# Altium PCB VNA_BASE_AF2.PcbDoc
Units mm, origin at the board's own origin, x right, y up, seen from the top; angles counter-clockwise.
Board outline 49.78 x 42.68 mm, 4 copper layers (Top Layer, Internal Plane 1, Signal Layer 1, Bottom Layer), stack 0.778 mm thick; 89 components, 116 nets, 460 pads, 227 vias.
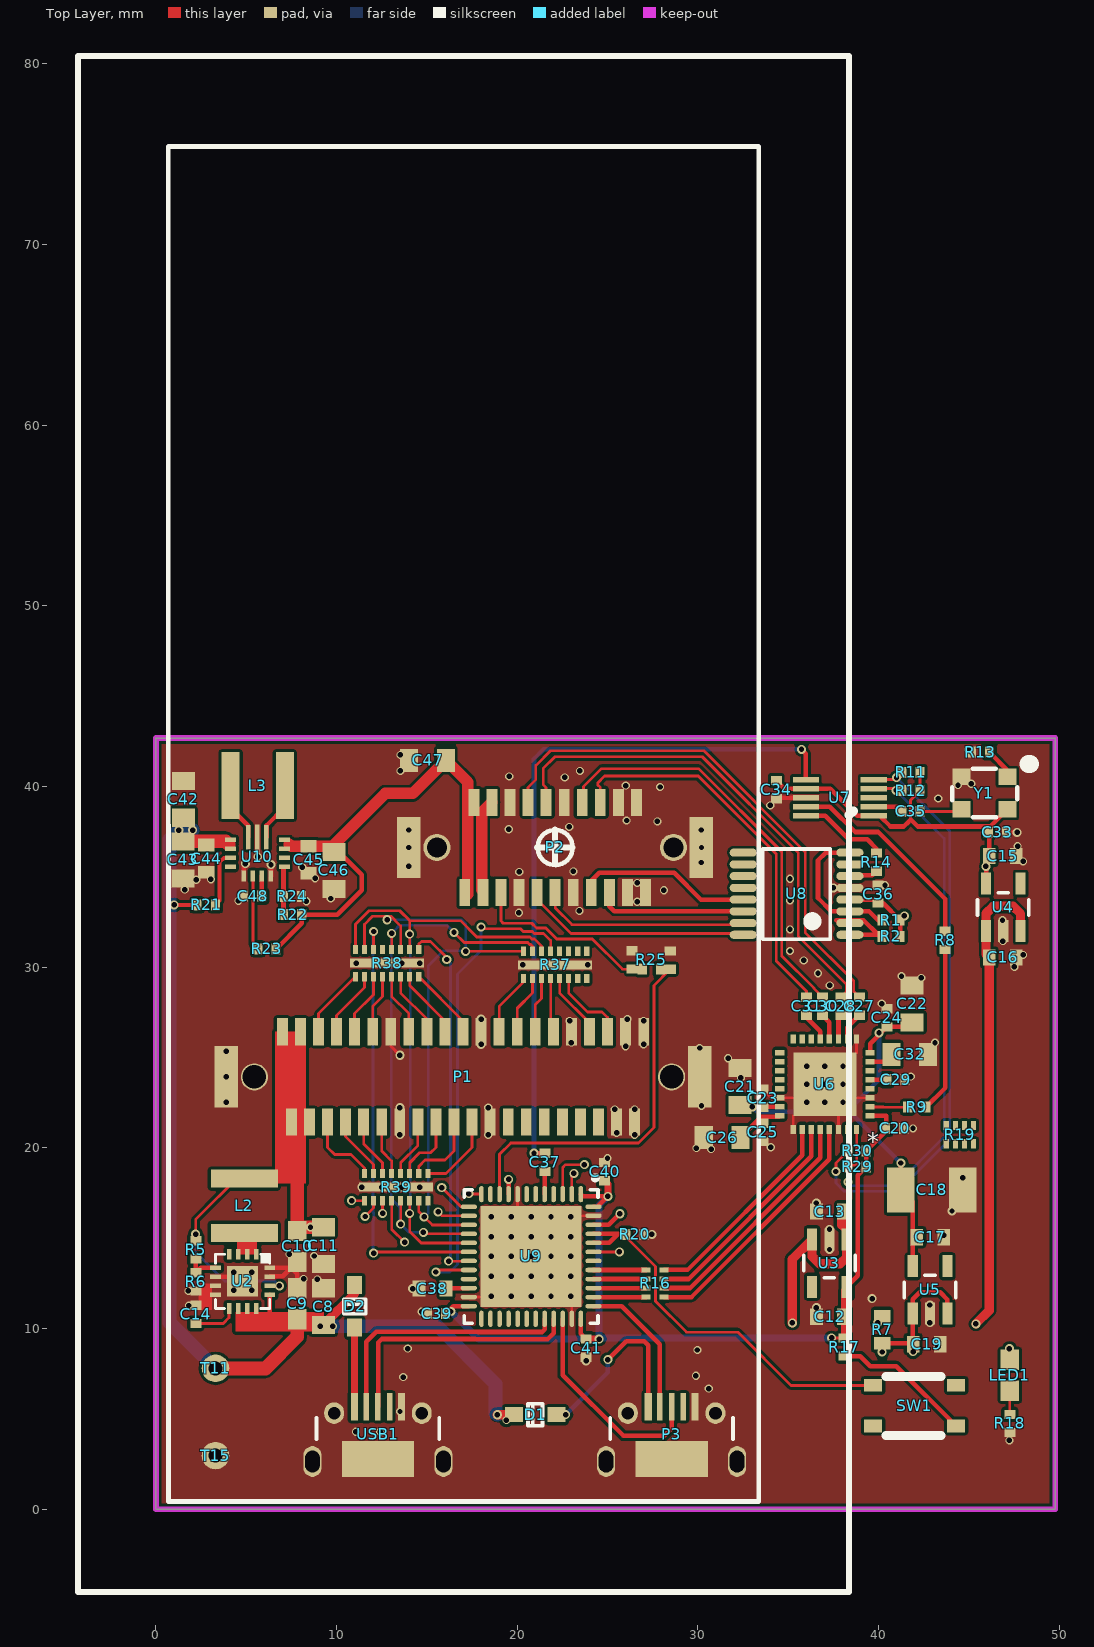
[diagram p0: Top Layer view]
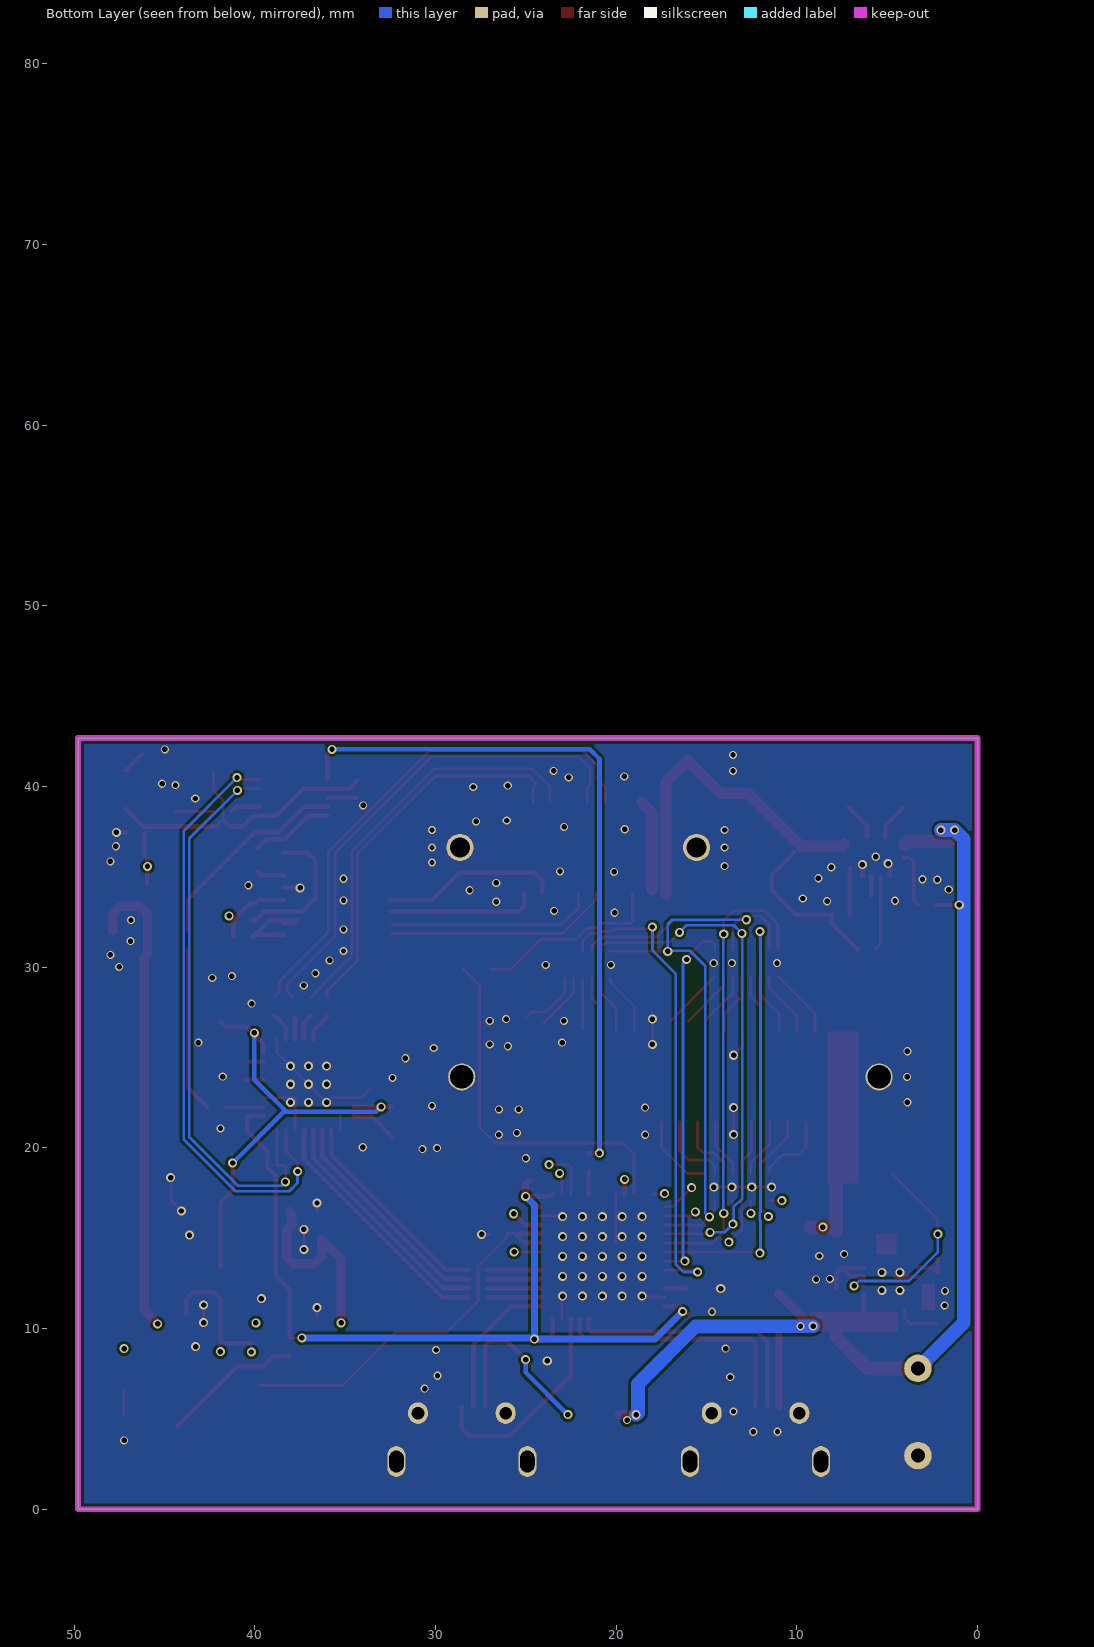
[diagram p1: Bottom Layer view, seen from below]
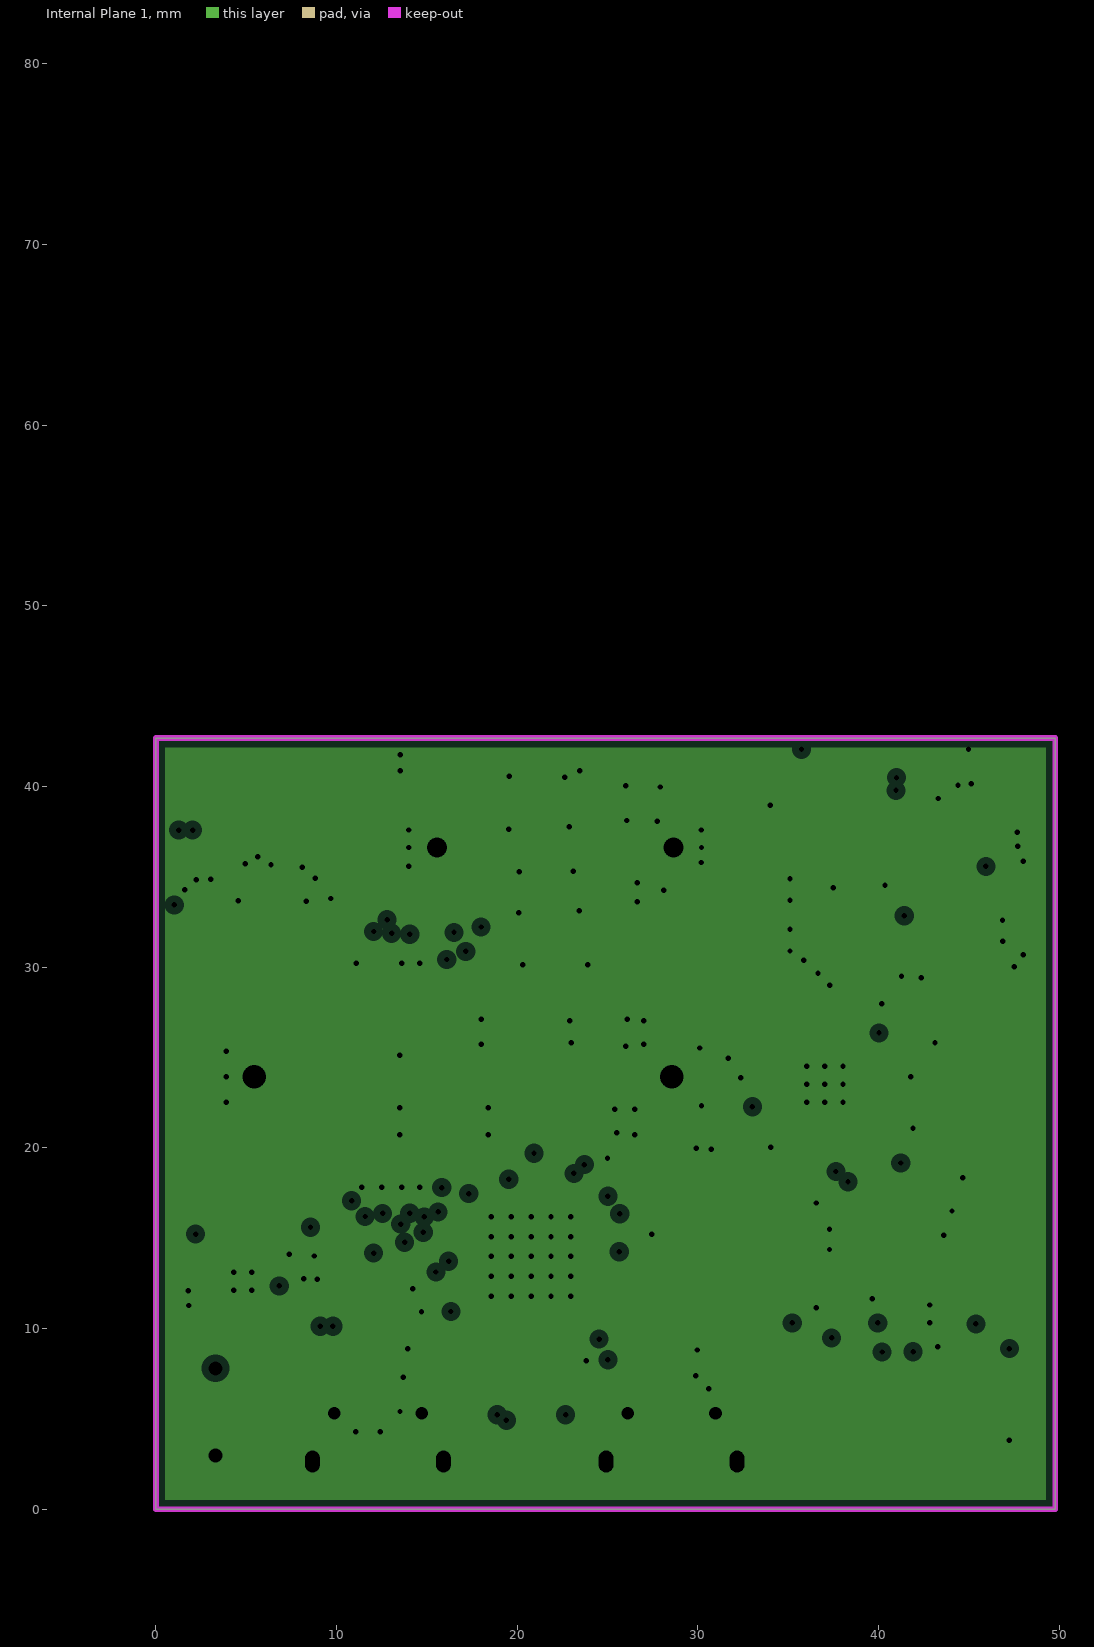
[diagram p2: Internal Plane 1, clearances drawn from the general rule]
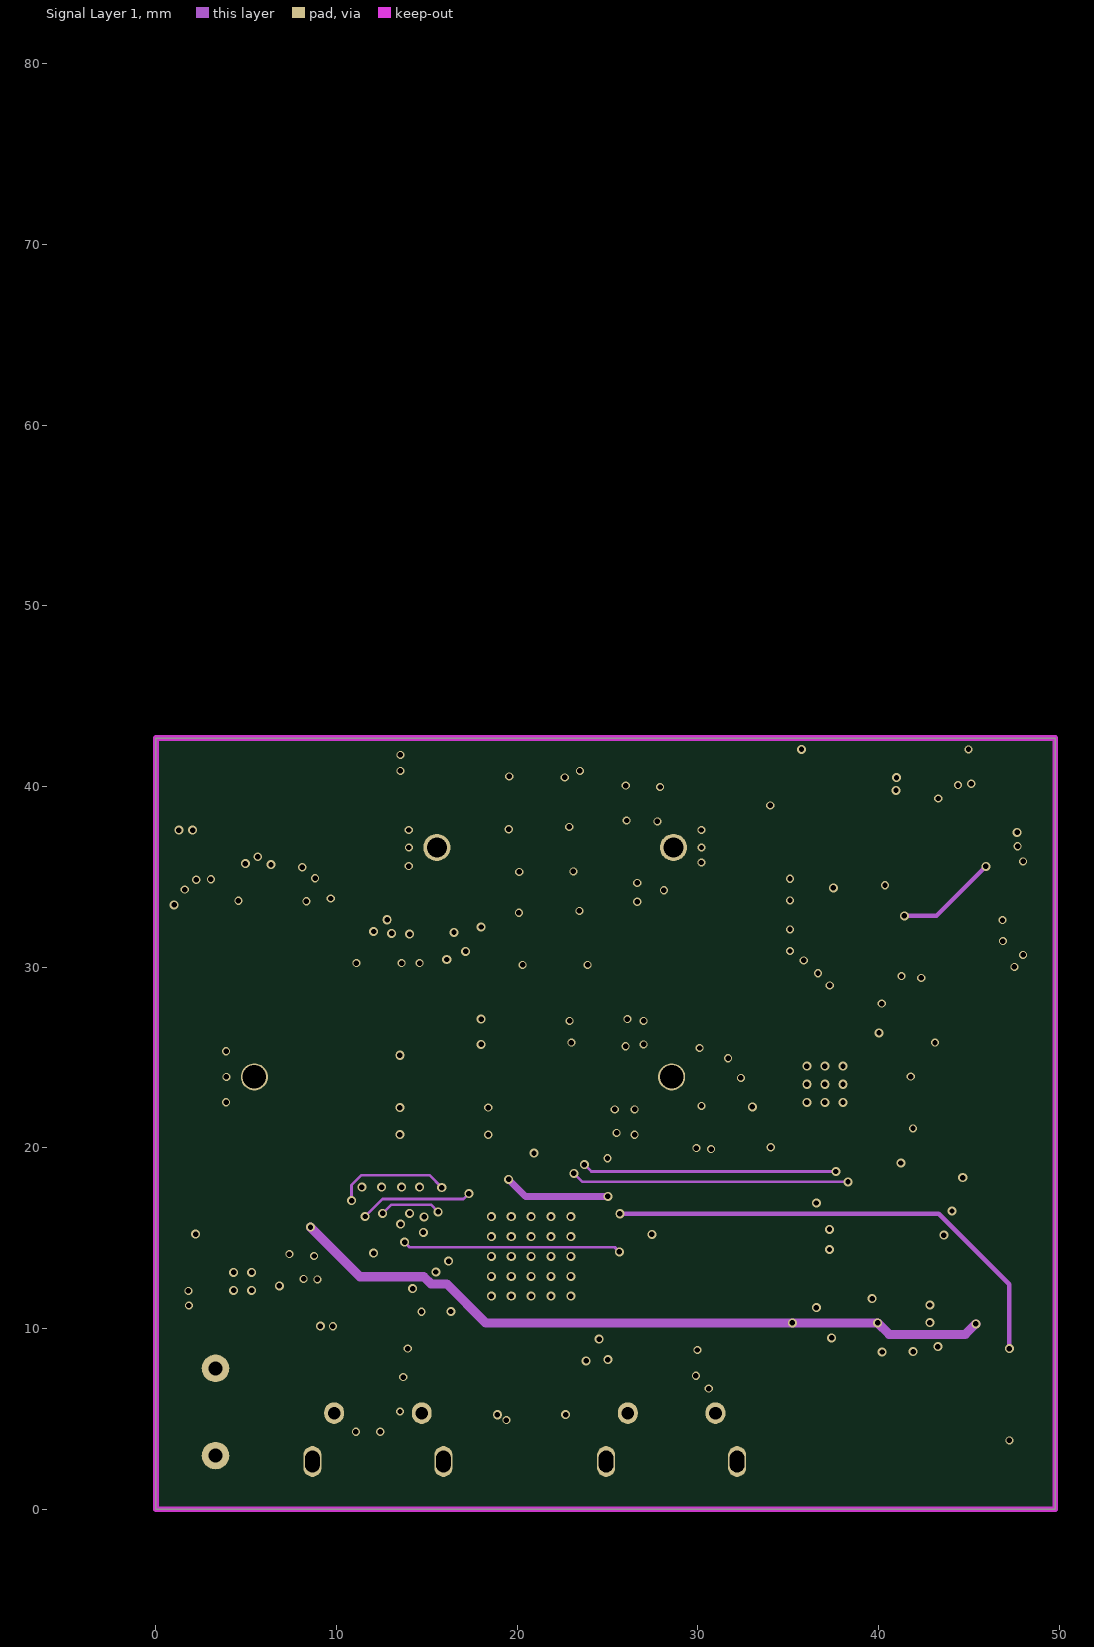
[diagram p3: Signal Layer 1]

## Layer stack, top to bottom
Top Solder: solder mask 0.0102, Solder Resist, Dk 3.8
Top Layer: signal copper 0.0356
Dielectric 1: core 0.254, Dk 4.2
Internal Plane 1: plane copper 0.036, net GND
Dielectric 3: core 0.254, Dk 4.2
Signal Layer 1: signal copper 0.036
Dielectric 4: prepreg 0.127, Dk 4.2
Bottom Layer: signal copper 0.0356
Bottom Solder: solder mask 0.0102, Solder Resist, Dk 3.8

## Board outline
0,0 0,42.682 49.784,42.682 49.784,0

## Design rules (kind name [scope] priority, off if disabled: settings)
Clearance 50R [InNetClass('50R') vs InPolygon] p1: gap=0.381 ignorepadtopadclearanceinfootprint=FALSE
Clearance [All] p2: gap=0.152 ignorepadtopadclearanceinfootprint=FALSE except(0: Arc-Hole Track-Hole SMDPad-Hole THPad-Hole Via-Hole Fill-Hole Poly-Hole Region-Hole Text-Hole)
DiffPairsRouting [All] p1: maxlimit=0.254 minlimit=0.152 mostfreqgap=0.152 toplayer_minwidth=0.152 toplayer_maxwidth=0.381 toplayer_prefwidth=0.381 midlayer1_minwidth=0.152 midlayer1_maxwidth=0.381 midlayer1_prefwidth=0.381 bottomlayer_minwidth=0.152 bottomlayer_maxwidth=0.381 bottomlayer_prefwidth=0.381 maxuncoupledlength=12.7
MinimumSolderMaskSliver [All] p1 off: minsoldermaskwidth=0.254
PlaneClearance [All] p1: clearance=0.381
PlaneConnect [All] p1: planeconnectstyle=Direct reliefexpansion=0.508 reliefentries=4 reliefconductorwidth=0.254 reliefairgap=0.254
PolygonConnect [All] p1: connectstyle=Direct reliefconductorwidth=0.254 reliefentries=4 polygonreliefangle="90 Angle" airgapwidth=0.254
RoomDefinition connectorA [InComponentClass('connectorA')] p1 off: confinementstyle=ConfineIn formatcopy=TRUE lockcomponents=FALSE outline 33.427,24.437 61.672,24.437 61.672,30.177 33.427,30.177
RoomDefinition AudioADCA [InComponentClass('AudioADCA')] p2 off: confinementstyle=ConfineIn formatcopy=TRUE lockcomponents=FALSE outline 33.427,4.015 132.437,4.015 132.437,13.032 33.427,13.032
RoomDefinition clock [InComponentClass('clock')] p3 off: confinementstyle=ConfineIn formatcopy=TRUE lockcomponents=FALSE outline 33.402,11.356 97.918,11.356 97.918,20.221 33.402,20.221
RoomDefinition MCU [InComponentClass('MCU')] p4 off: confinementstyle=ConfineIn formatcopy=TRUE lockcomponents=FALSE outline 22.328,39.982 254.738,39.982 254.738,48.872 22.328,48.872
RoomDefinition power [InComponentClass('power')] p5 off: confinementstyle=ConfineIn formatcopy=TRUE lockcomponents=FALSE outline 22.455,31.727 74.652,31.727 74.652,38.712 22.455,38.712
RoutingVias [All] p1: holewidth=0.305 width=0.508 viastyle="Through Hole" minholewidth=0.3 minwidth=0.5 maxholewidth=0.711 maxwidth=1.27
SilkToBoardRegionClearance [All] p1 off:
SilkToSilkClearance [All] p1 off: silktosilkclearance=0.254
SilkToSolderMaskClearance [IsPad] p1 off: minsilkscreentomaskgap=0.254 clearancetoexposedcopper=TRUE
SolderMaskExpansion [All] p1: expansion=0.102
Width [All] p1: maxlimit=1.524 minlimit=0.152 preferedwidth=0.152
23 further rules are at their usual default settings.

## Classes and differential pairs
component class MCU: C37 C38 C39 C40 C41 D1 D2 LED1 P3 R16 R17 R18 R19 R20 SW1 U9 USB1
component class connectorA: P1 P2 R25 R37 R38 R39
component class clock: C33 C34 C35 C36 R1 R2 R8 R11 R12 R13 R14 U7 U8 Y1
component class power: C8 C9 C10 C11 C12 C13 C14 C15 C16 C17 C18 C19 C42 C43 C44 C45 C46 C47 C48 L2 L3 R5 R6 R7 R21 R22 R23 R24 T11 T15 U2 U3 U4 U5 U10
component class AudioADCA: C20 C21 C22 C23 C24 C25 C26 C27 C28 C29 C30 C31 C32 R9 R29 R30 U6
differential pair REFLECT1: +REFLECT1_P -REFLECT1_N
differential pair REF1: +REF1_P -REF1_N

## Components (designator, comment, footprint, x,y, rotation, side; value= is the part's Value field where it differs from the comment)
C8 "Cap" 0805 9.269,11.218 r90 top value="22uF 25V"
C9 "Cap" 0603 7.821,11.37 r90 top value="4.7uF 25V"
C10 "Cap" 0603 7.821,14.545 r90 top value="4.7uF 25V"
C11 "Cap" 0805 9.269,14.596 r90 top value="22uF 25V"
C12 "4.7uF" 0603L 37.315,10.663 r0 top
C13 "4.7uF" 0603L 37.315,16.479 r0 top
C14 "3.3nF" 0402 2.211,10.786 r90 top
C15 "4.7uF" 0603L 46.878,36.157 r180 top
C16 "4.7uF" 0603L 46.878,30.544 r180 top
C17 "4.7uF" 0603L 42.872,15.058 r180 top
C18 "220uF,Tan" 1210 42.948,17.674 r180 top
C19 "4.7uF" 0603L 42.669,9.14 r180 top
C20 "0.1uF" 0402 40.894,21.082 r180 top
C21 "4.7uF" 0805 32.336,23.399 r270 top
C22 "4.7uF" 0805 41.861,27.971 r270 top
C23 "0.1uF" 0402 33.606,22.764 r270 top
C24 "0.1uF" 0402 40.464,27.209 r270 top
C25 "0.1uF" 0402 33.606,20.859 r90 top
C26 "4.7uF" 0805 31.344,20.574 r0 top
C27 "10uF" 0402 38.94,27.844 r90 top
C28 "10uF" 0402 37.924,27.844 r90 top
C29 "4.7uF" 0402 40.972,23.78 r180 top
C30 "10uF" 0402 36.908,27.844 r270 top
C31 "10uF" 0402 36.019,27.844 r270 top
C32 "22uF" 0805 41.734,25.177 r180 top
C33 "0.1uF" 0402 46.584,37.465 r180 top
C34 "0.1uF" 0402 34.342,39.84 r270 top
C35 "0.1uF" 0402 41.795,38.629 r180 top
C36 "0.1uF" 0402 39.977,34.06 r270 top
C37 "Cap" 0402 21.535,19.201 r90 top value=0.1uF
C38 "Cap" 0603L 15.312,12.216 r0 top value=4.7uF
C39 "Cap" 0402 15.533,10.833 r0 top value=0.1uF
C40 "Cap" 0402 24.837,18.693 r270 top value=0.1uF
C41 "Cap" 0402 23.821,8.914 r90 top value=0.1uF
C42 "10uF" 0805 1.524,39.294 r270 top
C43 "10uF" 0805 1.499,35.941 r90 top
C44 "0.1uF" 0603L 2.794,36.017 r90 top
C45 "0.1uF" 0603L 8.455,35.959 r90 top
C46 "10uF" 0805 9.852,35.359 r90 top
C47 "10uF" 0805 15.039,41.456 r0 top
C48 "0.1uF" 0402 5.359,33.934 r180 top
D1 "" LC-SOD-323 21.002,5.232 r0 top
D2 "" LC-SOD-323 11.002,11.232 r270 top
L2 "2.2uH" L4015 4.9,15.3 r90 top
L3 "1.5uH" L4015 4.137,40.06 r0 top
LED1 "LED0" 0603 47.268,7.421 r270 top
P1 "DF9-41S" VNA_CHANNEL 0.702,0.432 r0 top
P2 "DF9-21" DF9-21P 22.102,36.632 r180 bottom
P3 "SWD_MicroUSB" MICRO-YZX 28.55,-0.178 r0 top
R1 "10k" 0402 40.686,32.615 r0 top
R2 "10k" 0402 40.686,31.715 r0 top
R5 "51k 1%" 0402 2.211,14.367 r270 top
R6 "10k 1%" 0402 2.211,12.589 r270 top
R7 "FB" 0603L 40.202,9.932 r90 top value=0Ohm
R8 "22R" 0402 43.688,31.496 r270 top
R9 "22R" 0402 42.115,22.256 r0 top
R11 "4.7k" 0402 41.795,40.788 r180 top
R12 "4.7k" 0402 41.795,39.772 r180 top
R13 "NC" 0402 45.644,41.91 r180 top
R14 "22R" 0402 39.878,35.814 r90 top
R16 "50R*4" 0402X4 27.635,12.497 r180 top
R17 "1k" 0402 38.099,8.975 r90 top value=0Ohm
R18 "10k" 0402 47.268,4.754 r270 top value=0Ohm
R19 "50R*4" 0402X4 44.502,20.732 r90 top
R20 "Res2" 0402 26.518,15.215 r0 top value=10k
R21 "10k" 0402 2.794,33.452 r180 top
R22 "17k" 0402 7.566,32.911 r0 top
R23 "10k" 0402 6.147,31.013 r0 top
R24 "10k" 0402 7.566,33.927 r180 top
R25 "PiFilter" PiFIiter 27.432,29.896 r180 top
R29 "Res2" 0402 38.813,18.954 r0 top value=10k
R30 "Res2" 0402 38.813,19.843 r0 top value=10k
R37 "NUF8xxx" NUF8xxx 22.102,30.132 r0 top
R38 "NUF8xxx" NUF8xxx 12.802,30.232 r0 top
R39 "NUF8xxx" NUF8xxx 13.302,17.832 r0 top
SW1 "SW-PB" SW3x4 42.002,5.732 r0 top
T11 "TestPad" TestPad 3.302,7.798 r0 top
T15 "TestPad" TestPad 3.302,2.972 r90 top
U2 "TPS62130" TPS62130 4.802,12.615 r270 top
U3 "LP5907" SOT23-5 37.29,13.634 r180 top
U4 "LP5907" SOT23-5 46.904,33.312 r0 top
U5 "LP5907" SOT23-5 42.847,12.137 r0 top
U6 "ADAU1761" ADAU1761 37.035,23.526 r180 top
U7 "SI5351" si5351 37.858,39.391 r180 top
U8 "SN65LVDS105" "TSSOP16_44MM_065P - duplicate" 35.465,34.073 r180 top
U9 "STM32F401CCU6" STM-UFQFPN48_N 20.773,13.994 r270 top
U10 "tps63070" TPS63070 5.623,36.305 r90 top
USB1 "USB Micro Type B" MICRO-YZX 12.294,-0.178 r0 top
Y1 "OSC_40M" TXC_7Q 45.859,39.645 r180 top

## Footprints (in the part's own frame and the unit in brackets; to place one, negate y for a bottom-side part, rotate by r counter-clockwise, add the part's x,y. Pads: shape width x height; smd on the part's side, far side on the other; paste and mask are expansions set on the pad)
0402 [mil] "0402-RES"
  rect 20x24 smd: 1(-19.68,0) 2(20,0)
0402X4 [mm]
  rect 0.5x0.28 smd: 1(-0.5,0.75) 2(-0.5,0.25) 3(-0.5,-0.25) 4(-0.5,-0.75) 5(0.5,-0.75) 6(0.5,-0.25) 7(0.5,0.25) 8(0.5,0.75)
0603 [mil] "0603-RES"
  rect 44x40 smd: 1(-33.46,0) 2(34,0)
  body extent -31,-16 31,16, height 31
0603L [mm]
  rect 0.7x0.9 smd: 1(-0.75,0) 2(0.75,0)
  body extent -0.8,-0.4 0.8,0.4, height 0.8
0805 [mm]
  rect 1x1.27 smd: 1(-1.016,0) 2(1.016,0)
  body extent -1.27,-0.76 1.27,0.76, height 0.8
1210 [mm]
  rect 1.52x2.5 smd: 1(-1.715,0) 2(1.715,0)
ADAU1761 [mm]
  rect 3.5x3.5 smd: 0(0,0)
  rect 0.5x0.3 smd: 1(-2.5,1.75) 2(-2.5,1.25) 3(-2.5,0.75) 4(-2.5,0.25) 5(-2.5,-0.25) 6(-2.5,-0.75) 7(-2.5,-1.25) 8(-2.5,-1.75) 17(2.5,-1.75) 18(2.5,-1.25) 19(2.5,-0.75) 20(2.5,-0.25) 21(2.5,0.25) 22(2.5,0.75) 23(2.5,1.25) 24(2.5,1.75)
  rect 0.3x0.5 smd: 9(-1.75,-2.5) 10(-1.25,-2.5) 11(-0.75,-2.5) 12(-0.25,-2.5) 13(0.25,-2.5) 14(0.75,-2.5) 15(1.25,-2.5) 16(1.75,-2.5) 25(1.75,2.5) 26(1.25,2.5) 27(0.75,2.5) 28(0.25,2.5) 29(-0.25,2.5) 30(-0.75,2.5) 31(-1.25,2.5) 32(-1.75,2.5)
  body extent -2.5,-2.5 2.5,2.5, height 0.8
DF9-21P [mm]
  rect 1.3x3.4 smd far side: 0(-8.1,0) 0(8.1,0)
  round 1.5 hole 1.1: 0(-6.55,0) 0(6.55,0)
  rect 0.6x1.5 smd far side: 1(-5,-2.5) 2(-4,-2.5) 3(-3,-2.5) 4(-2,-2.5) 5(-1,-2.5) 6(0,-2.5) 7(1,-2.5) 8(2,-2.5) 9(3,-2.5) 10(4,-2.5) 11(5,-2.5) 12(4.5,2.5) 13(3.5,2.5) 14(2.5,2.5) 15(1.5,2.5) 16(0.5,2.5) 17(-0.5,2.5) 18(-1.5,2.5) 19(-2.5,2.5) 20(-3.5,2.5) 21(-4.5,2.5)
  body extent -8.08,-2.83 8.02,2.77, height 0.2
L4015 [mm]
  rect 1x3.7 smd: 1(0,0) 2(3,0)
LC-SOD-323 [mm]
  rect 1x0.83 smd: 1(1.18,0) 2(-1.18,0)
  silkscreen extent -0.4,-0.6 0.4,0.6, body extent -1.35,-0.62 1.35,0.63, height 1.1
MICRO-YZX [mm]
  rect 0.4x1.5 smd: 1(-1.3,5.85) 5(1.3,5.85)
  rect 0.3x1.5 smd: 2(-0.65,5.85) 3(0,5.85) 4(0.65,5.85)
  oval 1x1.7 hole 0.8 slot 1.2 at 90 deg: 5(-3.625,2.82) 5(3.625,2.82)
  oval 1.1x1.2 hole 0.7: 5(-2.425,5.5) 5(2.425,5.5)
  rect 4x2 smd: 5(0,2.95)
  silkscreen extent -3.4,4.05 3.4,5.25, body extent -4.02,0.33 3.98,5.93, height 2.6
NUF8xxx [mm]
  rect 4.1x0.5 smd: 0(0,0)
  rect 0.28x0.51 smd: 1(-1.75,-0.75) 2(-1.25,-0.75) 3(-0.75,-0.75) 4(-0.25,-0.75) 5(0.25,-0.75) 6(0.75,-0.75) 7(1.25,-0.75) 8(1.75,-0.75) 9(1.75,0.75) 10(1.25,0.75) 11(0.75,0.75) 12(0.25,0.75) 13(-0.25,0.75) 14(-0.75,0.75) 15(-1.25,0.75) 16(-1.75,0.75)
  body extent -2,-0.8 2,0.8, height 0.9
PiFIiter [mil]
  rect 24x20 smd: 1(-41,0) 2(42,-0.31) 3(-41,-39.68) 3(42,-40)
  rect 20x24 smd: 1(-19.69,0) 2(20,0)
si5351 [mm]
  rect 1.45x0.3 smd: 1(-1.875,1) 2(-1.875,0.5) 3(-1.875,0) 4(-1.875,-0.5) 5(-1.875,-1) 6(1.875,-1) 7(1.875,-0.5) 8(1.875,0) 9(1.875,0.5) 10(1.875,1)
  silkscreen extent -0.75,0.75 -0.5,0.95
SOT23-5 [mil] "SOT23-5"
  rect 22x48 smd: 1(-37.4,-51.19) 2(0,-51.19) 3(38,-51.19) 4(38,52) 5(-37.4,52)
  silkscreen extent -56,-17 56,32, body extent -57,-55 57,55, height 47
STM-UFQFPN48_N [mm] "QFN, 48-Leads, Body 7.1x7.1mm, Pitch 0.5mm, Thermal Pad 5.6x5.6mm, IPC Medium Density"
  oval 0.9x0.25 smd: 1(-3.45,2.75) 2(-3.45,2.25) 3(-3.45,1.75) 4(-3.45,1.25) 5(-3.45,0.75) 6(-3.45,0.25) 7(-3.45,-0.25) 8(-3.45,-0.75) 9(-3.45,-1.25) 10(-3.45,-1.75) 11(-3.45,-2.25) 12(-3.45,-2.75) 25(3.45,-2.75) 26(3.45,-2.25) 27(3.45,-1.75) 28(3.45,-1.25) 29(3.45,-0.75) 30(3.45,-0.25) 31(3.45,0.25) 32(3.45,0.75) 33(3.45,1.25) 34(3.45,1.75) 35(3.45,2.25) 36(3.45,2.75)
  oval 0.25x0.9 smd: 13(-2.75,-3.45) 14(-2.25,-3.45) 15(-1.75,-3.45) 16(-1.25,-3.45) 17(-0.75,-3.45) 18(-0.25,-3.45) 19(0.25,-3.45) 20(0.75,-3.45) 21(1.25,-3.45) 22(1.75,-3.45) 23(2.25,-3.45) 24(2.75,-3.45) 37(2.75,3.45) 38(2.25,3.45) 39(1.75,3.45) 40(1.25,3.45) 41(0.75,3.45) 42(0.25,3.45) 43(-0.25,3.45) 44(-0.75,3.45) 45(-1.25,3.45) 46(-1.75,3.45) 47(-2.25,3.45) 48(-2.75,3.45)
  rect 5.6x5.6 smd: 49(0,0)
  silkscreen extent -4.47,-3.7 3.7,3.7, body extent -3.55,-3.55 3.55,3.55, height 0.6
SW3x4 [mm]
  rect 1x0.7 smd: 1(-2.3,1.125) 2(2.3,-1.125) 3(2.3,1.125) 4(-2.3,-1.125)
  silkscreen extent -1.58,-1.65 1.45,1.63, body extent -2,-1.5 2,1.5, height 2.6
TestPad [mil]
  round 60 hole 30: 1(0,0)
TPS62130 [mm]
  rect 1.7x1.7 smd: 0(0,0)
  rect 0.6x0.25 smd: 1(-1.5,0.75) 2(-1.5,0.25) 3(-1.5,-0.25) 4(-1.5,-0.75) 9(1.5,-0.75) 10(1.5,-0.25) 11(1.5,0.25) 12(1.5,0.75)
  rect 0.25x0.6 smd: 5(-0.75,-1.5) 6(-0.25,-1.5) 7(0.25,-1.5) 8(0.75,-1.5) 13(0.75,1.5) 14(0.25,1.5) 15(-0.25,1.5) 16(-0.75,1.5)
  silkscreen extent -1.5,-1.5 1.5,1.5, body extent -1.5,-1.5 1.5,1.5, height 0.6
TPS63070 [mm]
  rect 0.6x0.25 smd: 1(-1.25,0.75) 2(-1.25,0.25) 3(-1.25,-0.25) 4(-1.25,-0.75)
  rect 0.25x0.6 smd: 5(-0.75,-1.5) 6(-0.25,-1.5) 7(0.25,-1.5) 8(0.75,-1.5) 12(0.75,1.5) 13(0.25,1.5) 14(-0.25,1.5) 15(-0.75,1.5)
  rect 1.35x0.25 smd: 9(0.9,-0.5) 11(0.9,0.5)
  rect 1.7x0.25 smd: 10(0.75,0)
  body extent -1.25,-1.5 1.25,1.5, height 1
"TSSOP16_44MM_065P - duplicate" [mm]
  oval 1.5x0.45 smd: 1(-2.95,2.275) 2(-2.95,1.625) 3(-2.95,0.975) 4(-2.95,0.325) 5(-2.95,-0.325) 6(-2.95,-0.975) 7(-2.95,-1.625) 8(-2.95,-2.275) 9(2.95,-2.275) 10(2.95,-1.625) 11(2.95,-0.975) 12(2.95,-0.325) 13(2.95,0.325) 14(2.95,0.975) 15(2.95,1.625) 16(2.95,2.275)
  silkscreen extent -1.88,-2.47 1.88,2.53
TXC_7Q [mm]
  rect 1x0.9 smd: 1(-1.275,-0.9) 2(1.275,-0.9) 3(1.275,0.9) 4(-1.275,0.9)
  silkscreen extent -2.52,-1.6 1.78,1.35
VNA_CHANNEL [mm]
  rect 1.3x3.4 smd: 0(3.2,23.5) 0(29.4,23.5)
  round 1.5 hole 1.3: 0(4.75,23.5) 0(27.85,23.5)
  rect 0.6x1.5 smd: 1(6.3,26) 2(7.3,26) 3(8.3,26) 4(9.3,26) 5(10.3,26) 6(11.3,26) 7(12.3,26) 8(13.3,26) 9(14.3,26) 10(15.3,26) 11(16.3,26) 12(17.3,26) 13(18.3,26) 14(19.3,26) 15(20.3,26) 16(21.3,26) 17(22.3,26) 18(23.3,26) 19(24.3,26) 20(25.3,26) 21(26.3,26) 22(25.8,21) 23(24.8,21) 24(23.8,21) 25(22.8,21) 26(21.8,21) 27(20.8,21) 28(19.8,21) 29(18.8,21) 30(17.8,21) 31(16.8,21) 32(15.8,21) 33(14.8,21) 34(13.8,21) 35(12.8,21) 36(11.8,21) 37(10.8,21) 38(9.8,21) 39(8.8,21) 40(7.8,21) 41(6.8,21)
  silkscreen extent -5,-5 37.66,80, body extent 3.28,20.7 29.38,26.3, height 0.4

## Part data
C8 C9 C10 C11 C37 C38 C39 C40 C41: "Capacitor", LatestRevisionDate=17-Jul-2002, LatestRevisionNote="Re-released for DXP Platform.", PackageDescription="Radial Cap, Thru-Hole; 2 Leads; 0.3 in Pin Spacing", PackageReference=RAD-0.3, Published=8-Jun-2000, Publisher="Altium Limited"
C12 C13 C14 C15 C16 C17 C18 C19 C20 C21 C22 C23 C24 C25 C26 C27 C28 C29 C30 C31 C32 C42 C43 C44 C45 C46 C47 C48: library part Cap, "Capacitor", LatestRevisionDate=17-Jul-2002, LatestRevisionNote="Re-released for DXP Platform.", PackageDescription="Radial Cap, Thru-Hole; 2 Leads; 0.3 in Pin Spacing", PackageReference=RAD-0.3, Published=8-Jun-2000, Publisher="Altium Limited"
C33 C34 C35 C36: library part CAP0402-CAP, "<b>Capacitor</b> / Standard 0603 ceramic capacitor, and 0.1\" leaded capacitor.", PARTNO=CC0402ZRY5V7BB104
D1 D2: library part "Diode 1N4148", "High Conductance Fast Diode", Code_JEDEC=DO-204-AH, ComponentLink1Description="Manufacturer Link", ComponentLink1URL=http://www.fairchildsemi.com/, ComponentLink2Description=Datasheet, ComponentLink2URL=http://www.fairchildsemi.com/ds/1N%2F1N4148.pdf, DatasheetVersion=1997, LatestRevisionDate=17-Jul-2002, LatestRevisionNote="Re-released for DXP Platform.", PackageDescription="Diode, Axial; Body 3.8 x 1.9 mm (LxDia. max), Lead Dia. 0.53 mm (max)", PackageReference=DO-35, Published=8-Jun-2000, Publisher="Altium Limited"
L2: library part Inductor, "Inductor", Code_IEC=1005, Code_JEITA=0402, LatestRevisionDate=29-May-2009, LatestRevisionNote="IPC-7351 Footprint Added.", PackageDescription="Chip Inductor", PackageReference=0402-A, Published=8-Jun-2000, Publisher="Altium Limited"
L3: library part "Inductor Iron Dot", "Magnetic-Core Inductor with Winding Polarity Marking", LatestRevisionDate=17-Jul-2002, LatestRevisionNote="Re-released for DXP Platform.", PackageDescription="Diode; 2 Leads", PackageReference=DIODE_SMC, Published=24-Mar-1999, Publisher="Altium Limited"
LED1: "Typical INFRARED GaAs LED", LatestRevisionDate=08-Jul-2005, LatestRevisionNote="Mech Layer 1 removed.", PackageDescription="LED; 2 Leads", PackageReference=LED-0, Published=8-Jun-2000, Publisher="Altium Limited"
P3: "Connector SMD USB Micro Type B middle mount", Manufacturer 1="Molex Inc", Package / Case=SMD, Supplier Part Number 1=WM17142CT-ND, SCDType=undef, Supplier 1=Digi-Key
R1 R2 R5 R6 R7 R8 R9 R11 R12 R13 R14 R17 R18 R21 R22 R23 R24: library part Res2, "Resistor", LatestRevisionDate=17-Jul-2002, LatestRevisionNote="Re-released for DXP Platform.", PackageDescription="Axial Device, Thru-Hole; 2 Leads; 0.4 in Pin Spacing", PackageReference=AXIAL-0.4, Published=8-Jun-2000, Publisher="Altium Limited"
R16 R19: library part Res*4, "Resistor", LatestRevisionDate=17-Jul-2002, LatestRevisionNote="Re-released for DXP Platform.", PackageDescription="Axial Device, Thru-Hole; 2 Leads; 0.4 in Pin Spacing", PackageReference=AXIAL-0.4, Published=8-Jun-2000, Publisher="Altium Limited"
R20 R29 R30: "Resistor", LatestRevisionDate=17-Jul-2002, LatestRevisionNote="Re-released for DXP Platform.", PackageDescription="Axial Device, Thru-Hole; 2 Leads; 0.4 in Pin Spacing", PackageReference=AXIAL-0.4, Published=8-Jun-2000, Publisher="Altium Limited"
SW1: "Switch", LatestRevisionDate=17-Jul-2002, LatestRevisionNote="Re-released for DXP Platform.", PackageDescription="Switch; 2 Leads", PackageReference=SPST-2, Published=24-Mar-1999, Publisher="Altium Limited"
U9: "ARM Cortex-M4 32-bit MCU+FPU, 105 DMIPS, 256 kB Flash, 64 kB Internal RAM, 36 I/Os, 48-pin UFQFPN, -40 to 85 degC, Tray", I/Os (High Current)=36, Manufacturer=STMicroelectronics, Operating Frequency(F) (Processor speed) (MHz)=84, Supplier Part Number 1=19X6217, Supply Voltage(Vcc) max (V)=3.6, Supply Voltage(Vcc) min (V)=1.8, ComponentLink1Description="Manufacturer URL", ComponentLink1URL=http://www.st.com/web/en/home.html, ComponentLink2Description=Datasheet, ComponentLink2URL=http://www.st.com/st-web-ui/static/active/en/resource/technical/document/data_brief/DM00071938.pdf, ComponentLink3Description="Package Specification", ComponentLink3URL=http://www.st.com/st-web-ui/static/active/en/resource/technical/document/data_brief/DM00071938.pdf, Core="ARM Cortex-M4", DatasheetVersion="Rev. 1", FLASH Size (Prog) (kB)=256, Internal RAM Size (kB)=64, Mounting Technology="Surface Mount", PackageDescription="48-Pin Ultra Thin Fine Pitch Quad Flat No-Lead, 7 x 7 x 0.6 mm Body, 0.5 mm Pitch, Exposed Pad", PackageReference=UFQFPN48, PackageVersion="Rev. 1, 04/2013", Packing=Tray, PartNumber=STM32F401CCU6, Supplier 1=Newark, Supplier 2=Mouser, Supplier Part Number 2=511-STM32F401CCU6
USB1: library part USB_Micro_TypeB, "Connector SMD USB Micro Type B middle mount", Manufacturer 1="Molex Inc", Manufacturer Part Number 1=47491-0001, Package / Case=SMD, Supplier Part Number 1=WM17142CT-ND, SCDType=undef, Supplier 1=Digi-Key

## Via types
v1: diameter 0.5, hole 0.3, Top Layer to Bottom Layer, 123 vias
v2: diameter 0.45, hole 0.3, Top Layer to Bottom Layer, 104 vias

## Nets (pads, with @x,y where several pads share a name; then routed paths per layer and width w, separated by ;. In a path a pad name is that pad's centre, name@x,y a point inside that pad or via, vN(x,y) a via of type N, cw(c..) or ccw(c..) an arc to the next point about the centre after c; other vN are vias at no path point)
3.3A: C17.2 C18.2 C21.2 C22.2 C23.2 C24.2 U5.5 U6.8 U6.23 | length 26
  Top Layer w0.254: C21.2@32.443,22.276 v1(33.02,22.276) U6.23 ; U6.8 39.535,25.772 C24.2 41.607,26.701 C22.2 ; v1(41.233,19.168) C18.2 41.897,17.011 U5.5
  Bottom Layer w0.254: v1(33.02,22.276) 33.299,21.996 38.254,21.996 ; v1(40.03,26.365) 40.03,23.773 38.254,21.996 ; v1(41.233,19.168) 38.405,21.996 38.254,21.996
3.3Clock: C15.2 C33.2 C34.1 C36.2 R1.2 R2.2 R11.1 R12.1 U4.5 U7.1 U7.7 U8.4 Y1.4 | length 30.1
  Top Layer w0.152: 41.635,38.096 41.769,38.23 41.769,39.247 R12.1 R11.1
  Top Layer w0.254: C34.1 34.791,39.891 U7.7 37.325,39.891 38.825,38.391 U7.1 40.069,38.391 40.665,37.795 41.407,37.795 41.671,38.06 ; U8.4 39.781,33.748 C36.2 40.257,33.552 R1.2 ; R2.2 R1.2 ; v1(41.427,32.849) R1.2 ; 41.791,38.179 42.175,37.795 46.184,37.795 Y1.4 Y1.4@47.151,38.762 ; U4.5 C15.2@45.954,35.983 ; C15.2 C33.2@46.128,37.412
  Signal Layer 1 w0.254: v1(41.427,32.849) 43.212,32.849 v1(45.949,35.585)
3.3D: C12.2 C20.2 C39.2 C40.2 C41.2 R17.2 R29.2 R30.2 U3.5 U6.1 U9.1 U9.9 U9.24 U9.36 U9.48 | length 58.3
  Top Layer w0.152: v1(37.406,9.483) R17.2
  Top Layer w0.254: C39.2 16.452,11.244 U9.24 ; U9.9 v1@19.523,18.253 ; U9.36 23.523,9.72 C41.2 ; U9.1 23.644,17.323 v1(25.019,17.323) 24.44,16.744 U9.48 ; R17.2 38.065,9.516 C12.2 38.065,12.139 U3.5 38.86,12.934 38.86,18.493 R29.2 R30.2 40.436,20.958 40.436,21.776 U6.1
  Top Layer w0.381: C41.2 v1(24.535,9.422) ; C40.2 25.019,18.003 v1(25.019,17.323)
  Signal Layer 1 w0.381: v1(19.533,18.263) 20.472,17.323 v1(25.019,17.323)
  Bottom Layer w0.381: v1(16.332,10.947) 17.858,9.422 v1(24.535,9.422) ; v1(25.019,17.323) 24.535,16.839 v1(24.535,9.422) ; v1(37.406,9.483) 24.596,9.483 v1(24.535,9.422)
3.6V: C10.2 C11.2 C13.2 C16.2 L2.2 P1.1 P1.2 P1.40 P1.41 R5.1 R7.2 U2.14 U3.1 U3.3 U4.1 U4.3 | length 92.3
  Top Layer w0.152: v1(2.202,15.232) 2.202,16.038 L2.2@4.725,18.561 ; U2.14 v1(6.835,12.365)
  Top Layer w0.508: v1(35.23,10.312) 35.23,13.84 U3.3 36.325,13.993 36.728,13.589 37.871,13.589 38.24,13.957 U3.1 38.24,15.476 37.976,15.74 37.948,15.74 37.948,16.362 C13.2 ; v1(45.39,10.262) 46.128,11 C16.2 ; C16.2@45.954,30.718 U4.1 45.954,32.974 46.355,33.376 47.447,33.376 47.869,32.954 U4.3
  Top Layer w0.762: C10.2 7.821,18.57 ; C10.2@8.024,15.612 v1(8.56,15.612) C11.2
  Signal Layer 1 w0.508: v1(8.56,15.612) 11.3,12.872 14.833,12.872 15.23,12.475 16.1,12.475 18.263,10.312 v1(35.23,10.312) v1(39.954,10.312) 40.588,9.678 44.806,9.678 v1(45.39,10.262)
  Bottom Layer w0.152: v1(2.202,15.232) 2.202,14.232 3.802,12.632 6.568,12.632 v1(6.835,12.365)
5.5V-A: C45.2 C46.2 C47.2 P2.10 P2.11 P2.12 P2.13 R22.2 R23.2 U10.7 U10.8 | length 32.7
  Top Layer w0.254: R23.2 8.074,32.432 R22.2 10.051,32.911 11.405,34.265 11.405,35.122 C46.2@10.152,36.375
  Top Layer w0.635: 7.391,36.805 7.487,36.709 C45.2 9.785,36.709 12.7,39.624 14.223,39.624 C47.2 17.272,40.239 P2.11@17.272,34.036 ; P2.10@18.034,34.29 18.034,38.564 P2.13
GND: C8.2 C9.2 C10.1 C11.1 C12.1 C13.1 C14.2 C15.1 C16.1 C17.1 C18.1 C19.1 C20.1 C21.1 C22.1 C23.1 C24.1 C25.1 C26.1 C29.1 C32.1 C33.1 C34.2 C36.1 C38.1 C39.1 C40.1 C41.1 C42.1 C43.1 C44.1 C45.1 C46.1 C47.1 C48.2 P1.0 P1.7 P1.12 P1.17 P1.20 P1.21 P1.22 P1.23 P1.30 P1.35 P2.0 P2.1 P2.2 P2.5 P2.8 P2.14 P2.17 P2.20 P2.21 P3.5 R6.2 R13.2 R18.2 R20.2 R24.1 R25.3 R37.0 R38.0 R39.0 T15.1 U2.0 U2.6 U2.7 U2.8 U2.15 U2.16 U3.2 U4.2 U5.2 U6.0 U6.3 U6.9 U6.22 U6.25 U6.30 U7.8 U8.5 U9.8 U9.23 U9.35 U9.47 U9.49 U10.1 U10.4 U10.10 USB1.5 Y1.2 | length 41.5
  Top Layer w0.152: v1(11.402,17.832) v1(12.502,17.832) R39.0 v1(13.602,17.832) v1(14.602,17.832) ; P1.7 13.002,25.632 v1(13.502,25.132) ; v1(13.502,20.732) P1.35 v1(13.502,22.232) ; v1(14.218,12.216) C38.1 ; U9.23 U9.49@18.523,11.744 ; v1(18.002,25.732) P1.12 v1(18.002,27.132) ; U9.49@20.023,14.744 U9.8 ; U9.35 U9.49@23.023,11.744 ; U9.49@23.023,16.244 U9.47 ; v1(23.821,8.213) C41.1 ; R20.2 v1(27.457,15.215) ; C23.1 34.094,22.776 U6.22 U6.0@35.785,22.776 ; U6.25 U6.0@35.285,21.776 ; v1(36.035,22.526) v1(37.035,23.526) ; C12.1 v1(36.565,11.165) ; C13.1 v1(36.565,16.953) ; U6.0@37.035,23.446 v1(37.035,23.526) ; v1(37.29,14.379) U3.2 v1(37.29,15.491) ; U6.30 37.785,22.776 U6.3 ; U6.9 38.785,25.276 v1(38.035,24.526) v1(37.035,23.526) ; v1(39.648,11.657) v1@39.648,11.866 ; v1(42.847,10.335) U5.2 v1(42.847,11.306) ; v1(43.282,9.002) C19.1 ; C17.1 v1(43.622,15.174) ; v1(44.069,16.51) 44.663,17.104 C18.1 v1(44.663,18.354)
  Top Layer w0.254: U2.6 U2.0@4.552,12.865 ; U10.1 4.873,35.683 4.928,35.738 v1(4.953,35.738) ; U2.15 6.302,12.894 7.02,12.894 C10.1@7.491,13.365 ; U2.16 C10.1@7.491,13.365 ; U10.4 6.373,35.684 v1(6.375,35.687) ; C9.2 7.821,13.034 C10.1@7.491,13.365 ; C34.2@34.401,39.391 U7.8 ; v1(37.497,34.398) U8.5 ; C33.1 v1(47.676,37.465)
  other v1: 18.573,11.794 19.673,11.794 20.773,11.794 21.873,11.794 22.973,11.794 4.302,12.115 5.302,12.115 18.573,12.894 19.673,12.894 20.773,12.894 21.873,12.894 22.973,12.894 4.302,13.115 5.302,13.115 18.573,13.994 19.673,13.994 20.773,13.994 21.873,13.994 22.973,13.994 18.573,15.094 19.673,15.094 20.773,15.094 21.873,15.094 22.973,15.094 18.573,16.194 19.673,16.194 20.773,16.194 21.873,16.194 22.973,16.194 37.035,22.526 38.035,22.526 36.035,23.526 38.035,23.526 36.035,24.526 37.035,24.526
  other v2: 47.244,3.81 11.074,4.293 12.421,4.293 13.513,5.41 30.607,6.68 13.691,7.315 29.896,7.391 29.972,8.814 13.945,8.89 14.702,10.932 1.829,11.278 1.803,12.09 8.941,12.725 8.179,12.751 8.763,14.021 7.391,14.122 25.002,19.432 30.734,19.939 29.921,19.99 34.036,20.041 18.402,20.732 26.502,20.732 25.502,20.832 41.91,21.082 25.402,22.132 26.502,22.132 18.402,22.232 30.202,22.332 3.886,22.53 32.385,23.876 3.902,23.932 41.783,23.952 31.674,24.968 3.886,25.349 30.102,25.532 26.002,25.632 27.002,25.732 23.002,25.832 43.129,25.832 22.902,27.032 27.002,27.032 26.102,27.132 40.183,27.991 37.3,29 42.367,29.413 41.275,29.515 36.652,29.667 47.523,30.023 20.302,30.132 23.902,30.132 11.102,30.232 13.602,30.232 14.602,30.232 35.865,30.378 48.006,30.683 35.1,30.9 46.888,31.445 35.1,32.1 46.863,32.614 20.091,33.02 23.444,33.122 26.645,33.63 8.331,33.655 4.572,33.68 35.1,33.7 9.677,33.807 28.118,34.265 1.6,34.3 40.361,34.544 26.645,34.671 2.235,34.849 3.048,34.874 35.1,34.9 8.814,34.925 20.117,35.281 23.114,35.306 8.103,35.535 14,35.6 30.2,35.8 48.006,35.865 5.639,36.119 14.002,36.632 30.202,36.632 47.701,36.703 14,37.6 30.2,37.6 19.533,37.643 22.885,37.77 27.762,38.075 26.06,38.125 34.011,38.964 43.307,39.345 27.915,39.98 26.01,40.056 44.399,40.081 45.136,40.157 22.631,40.513 19.558,40.564 13.538,40.869 23.47,40.869 13.538,41.758 44.983,42.062
KEY: R20.1 SW1.1 U9.44 U9.45 | length 21.8
  Top Layer w0.152: 25.607,15.264 26.082,15.264 26.082,15.014 27.657,13.439 27.657,11.512 29.364,9.804 32.207,9.804 35.155,6.857 SW1.1
  Top Layer w0.254: U9.44 25.087,14.744 25.587,15.244 U9.45
NetC14_1: C14.1 U2.9 | length 2.5
  Top Layer w0.152: C14.1 3.733,10.286 4.052,10.605 U2.9
NetC19_2: C19.2 R7.1 U5.1 U5.3 | length 8.1
  Top Layer w0.152: v1(40.202,8.706) R7.1 ; v1(41.919,8.721) C19.2
  Top Layer w0.254: R7.1 41.877,9.182 C19.2@41.897,9.162 ; C19.2 C19.2@41.897,9.162 ; U5.3 43.812,11.611 43.409,12.014 42.291,12.014 41.897,11.62 U5.1 C19.2@41.897,9.162
NetC25_2: C25.2 C26.2 U6.24 | length 2.7
  Top Layer w0.254: C26.2 33.508,21.722 34.535,21.722 U6.24
NetC27_1: C27.1 U6.10 | length 1.6
  Top Layer w0.254: U6.10 38.285,26.689 C27.1
NetC28_1: C28.1 U6.11 | length 1.2
  Top Layer w0.254: U6.11 C28.1@37.785,27.205
NetC29_2: C29.2 U6.5 | length 0.9
  Top Layer w0.254: U6.5 C29.2@40.46,23.776
NetC30_2: C30.2 U6.12 | length 1.5
  Top Layer w0.254: C30.2 37.285,26.959 U6.12
NetC31_2: C31.2 U6.13 | length 1.6
  Top Layer w0.254: C31.2 36.019,27.215 36.785,26.449 U6.13
NetC32_2: C32.2 U6.7 | length 0.8
  Top Layer w0.254: U6.7 C32.2@40.317,24.776
NetC35_1: C35.1 Y1.3 | length 2.2
  Top Layer w0.152: C35.1 Y1.3@44.468,38.629
NetC35_2: C35.2 U7.2 | length 1.7
  Top Layer w0.254: U7.2 41.025,38.891 C35.2
NetC37_1: C37.1 U9.5 | length 1.2
  Top Layer w0.254: U9.5 C37.1@21.523,18.689
NetC37_2: C37.2 U7.6 | length 39.2
  Top Layer w0.254: v1(20.931,19.709) C37.2 ; v1(35.738,42.062) 35.983,41.817 U7.6
  Bottom Layer w0.254: v1(20.931,19.709) 20.931,41.531 21.463,42.062 v1(35.738,42.062)
NetC38_2: C38.2 U9.22 | length 1.2
  Top Layer w0.254: C38.2@16.09,12.244 U9.22
NetC48_1: C48.1 U10.3 | length 1.1
  Top Layer w0.254: C48.1@5.873,33.961 U10.3
NetD1_1: D1.1 P3.1 | length 10.2
  Top Layer w0.254: v1(25.019,8.28) 26.035,9.296 27.026,9.296 27.252,9.07 P3.1@27.252,5.675
  Bottom Layer w0.254: v1(22.682,5.232) 25.019,7.569 v1(25.019,8.28)
NetD2_1: D2.1 USB1.1 | length 4.4
  Top Layer w0.381: USB1.1@11.002,5.681 D2.1
NetL2_1: L2.1 U2.1 U2.2 U2.3
NetLED1_1: LED1.1 U9.46 | length 28.5
  Top Layer w0.254: U9.46 25.066,15.744 v1(25.679,16.358)
  Signal Layer 1 w0.254: v1(25.679,16.358) 43.332,16.358 47.244,12.446 v1(47.244,8.89)
NetLED1_2: LED1.2 R18.1 | length 1.3
  Top Layer w0.152: R18.1 LED1.2
NetP1_3: P1.3 R38.1 | length 3.9
  Top Layer w0.152: P1.3 9.002,27.432 R38.1
NetP1_4: P1.4 R38.2 | length 3.7
  Top Layer w0.152: P1.4 10.002,27.332 11.552,28.882 R38.2
NetP1_5: P1.5 R38.3 | length 3.5
  Top Layer w0.152: P1.5 11.002,27.432 12.052,28.482 R38.3
NetP1_6: P1.6 R38.4 | length 3.3
  Top Layer w0.152: P1.6 12.002,27.832 12.552,28.382 R38.4
NetP1_8: P1.8 R38.5 | length 3.4
  Top Layer w0.152: R38.5 13.052,28.382 14.002,27.432 P1.8
NetP1_9: P1.9 R38.6 | length 3
  Top Layer w0.152: R38.6 13.552,28.582 P1.9@15.002,27.132
NetP1_10: P1.10 R38.7 | length 3.3
  Top Layer w0.152: R38.7 14.052,28.982 P1.10@16.002,27.032
NetP1_11: P1.11 R38.8 | length 3.5
  Top Layer w0.152: R38.8 P1.11@17.002,27.032
NetP1_13: P1.13 R37.1 | length 3.5
  Top Layer w0.152: P1.13 19.002,27.832 20.352,29.182 R37.1
NetP1_14: P1.14 R37.2 | length 3.3
  Top Layer w0.152: P1.14 20.002,27.732 20.852,28.582 R37.2
NetP1_15: P1.15 R37.3 | length 3.1
  Top Layer w0.152: P1.15 21.002,27.932 21.352,28.282 R37.3
NetP1_16: P1.16 R37.4 | length 2.8
  Top Layer w0.152: P1.16@21.852,26.582 R37.4
NetP1_18: P1.18 R37.5 | length 3.1
  Top Layer w0.152: R37.5 22.352,28.582 P1.18@24.002,26.932
NetP1_19: P1.19 R37.6 | length 3.5
  Top Layer w0.152: R37.6 22.852,28.582 23.902,27.532 24.702,27.532 25.002,27.232
NetP1_31: P1.31 R39.9 | length 4.5
  Top Layer w0.152: R39.9 16.052,18.582 17.502,20.032 P1.31
NetP1_32: P1.32 R39.10 | length 4.3
  Top Layer w0.152: R39.10 14.552,18.982 14.902,19.332 16.002,19.332 16.502,19.832 P1.32
NetP1_33: P1.33 R39.11 | length 3.8
  Top Layer w0.152: R39.11 14.052,19.182 14.602,19.732 15.202,19.732 15.502,20.032 P1.33
NetP1_34: P1.34 R39.12 | length 3.2
  Top Layer w0.152: R39.12 13.552,19.182 14.502,20.132 P1.34
NetP1_36: P1.36 R39.13 | length 3.1
  Top Layer w0.152: P1.36 12.502,19.832 13.052,19.282 R39.13
NetP1_37: P1.37 R39.14 | length 3.3
  Top Layer w0.152: P1.37 11.502,20.232 12.552,19.182 R39.14
NetP1_38: P1.38 R39.15 | length 3.5
  Top Layer w0.152: P1.38 10.502,20.632 12.052,19.082 R39.15
NetP1_39: P1.39 R39.16 | length 4.2
  Top Layer w0.152: P1.39 9.502,20.032 9.902,19.632 10.802,19.632 11.552,18.882 R39.16
NetP2_3: P2.3 U8.14 | length 8.3
  Top Layer w0.254: P2.3 25.102,33.369 25.373,33.098 U8.14
NetP2_4: P2.4 U8.13 | length 9.9
  Top Layer w0.254: P2.4 24.102,34.795 24.536,35.23 28.695,35.23 30.177,33.748 U8.13
NetP2_6: P2.6 U8.15 | length 11.5
  Top Layer w0.152: P2.6 22.102,33.298 23.04,32.36 U8.15@32.426,32.36
NetP2_7: P2.7 U8.16 | length 12.5
  Top Layer w0.152: P2.7 21.102,33.759 22.984,31.877 U8.16@32.436,31.877
NetP2_9: P2.9 R25.2 | length 10.5
  Top Layer w0.152: P2.9 19.102,32.562 19.228,32.437 20.809,32.437 21.064,32.181 21.584,32.181 22.193,31.572 24.155,31.572 25.832,29.896 R25.2@26.924,29.896
NetR1_1: R1.1 U8.3 U8.8 | length 8.1
  Top Layer w0.254: U8.8 37.085,36.348 36.652,35.916 36.652,33.833 37.387,33.098 U8.3 39.477,33.098 39.96,32.615 R1.1
NetR2_1: R2.1 U8.1 U8.2 | length 5.4
  Top Layer w0.254: U8.1 R2.1@39.984,31.798 ; U8.2 37.826,32.448 37.681,32.594 ; R2.1@40.103,31.798 R2.1@39.984,31.798 ; R2.1 40.067,31.715 R2.1@39.984,31.798 ; 37.681,32.594 37.661,32.594 37.661,32.614 37.681,32.594 ; 37.681,32.594 39.149,32.594 39.169,32.614 R2.1@39.984,31.798
NetR5_2: R5.2 R6.1 U2.5 | length 2
  Top Layer w0.254: R5.2 R6.1 2.486,13.365 U2.5
NetR8_1: R8.1 U7.9 | length 11.6
  Top Layer w0.254: U7.9 37.309,38.891 38.71,37.49 39.98,37.49 43.688,33.782 R8.1
NetR8_2: R8.2 R9.2 | length 9.2
  Top Layer w0.254: R9.2 43.688,23.321 R8.2
NetR9_1: R9.1 U6.2 | length 2.1
  Top Layer w0.152: U6.2 39.535,22.273 40.262,22.273 40.284,22.25 41.61,22.25 R9.1
NetR11_2: R11.2 R30.1 U6.31 U7.5 U9.3 | length 50.7
  Top Layer w0.152: U9.3 22.523,18.916 22.682,19.075 v1(23.724,19.075) ; v1(37.643,18.694) 37.643,19.173 R30.1 ; R30.1@38.285,19.871 U6.31 ; U7.5 40.89,40.391 v1(40.996,40.497) R11.2
  Signal Layer 1 w0.152: v1(23.724,19.075) 24.105,18.694 v1(37.643,18.694)
  Bottom Layer w0.152: v1(37.643,18.694) 37.643,18.059 38.1,17.602 41.071,17.602 43.942,20.473 43.942,37.551 v1(40.996,40.497)
NetR12_2: R12.2 R29.1 U6.32 U7.4 U9.2 | length 47.8
  Top Layer w0.152: U9.2 v1@23.023,18.476 ; v1(38.313,18.126) R29.1 38.405,19.046 38.796,19.046 38.796,21.015 U6.32 ; U7.4 v1@40.869,39.891 ; v1(40.97,39.79) v1@40.869,39.891 ; R12.2@41.168,39.891 v1@40.869,39.891
  Signal Layer 1 w0.152: v1(23.139,18.593) 23.606,18.126 v1(38.313,18.126)
  Bottom Layer w0.152: 38.532,17.907 40.945,17.907 43.637,20.599 43.637,37.123 v1(40.97,39.79)
NetR13_1: R13.1 Y1.1 | length 1.3
  Top Layer w0.254: R13.1@46.232,41.804 Y1.1@47.134,40.902
NetR14_1: R14.1 U8.6 | length 1.6
  Top Layer w0.254: U8.6 38.415,35.094 39.658,35.094 R14.1
NetR14_2: R14.2 U7.10 | length 4.6
  Top Layer w0.254: U7.10 37.047,38.391 38.354,37.084 39.37,37.084 39.878,36.576
NetR16_1: R16.1 U6.29 | length 14
  Top Layer w0.254: R16.1 29.651,11.747 37.285,19.381 U6.29
NetR16_2: R16.2 U6.28 | length 13.2
  Top Layer w0.254: R16.2 29.576,12.247 36.785,19.456 U6.28
NetR16_3: R16.3 U6.27 | length 12.5
  Top Layer w0.254: R16.3 29.501,12.747 36.285,19.53 U6.27
NetR16_4: R16.4 U6.26 | length 11.7
  Top Layer w0.254: R16.4 29.427,13.247 35.785,19.605 U6.26
NetR16_5: R16.5 U9.41 | length 2.9
  Top Layer w0.254: U9.41 R16.5@27.132,13.244
NetR16_6: R16.6 U9.40 | length 2.9
  Top Layer w0.254: U9.40 R16.6@27.132,12.744
NetR16_7: R16.7 U9.39 | length 2.9
  Top Layer w0.254: U9.39 R16.7@27.132,12.244
NetR17_1: R17.1 SW1.2 | length 7.8
  Top Layer w0.254: R17.1 38.998,8.475 39.548,7.925 40.984,7.925 SW1.2
NetR19_1: R19.1
NetR19_2: R19.2
NetR19_3: R19.3
NetR19_4: R19.4
NetR21_1: R21.1 U10.14 | length 3.2
  Top Layer w0.203: R21.1 3.527,33.685 3.527,35.81 3.772,36.055 U10.14
NetR22_1: R22.1 R24.2 U10.5 | length 2.6
  Top Layer w0.254: R22.1 U10.5@7.066,35.498
NetR23_1: R23.1 U10.2 | length 4.2
  Top Layer w0.152: U10.2 5.373,31.288 R23.1
NetR25_1: R25.1 U9.10 | length 20.5
  Top Layer w0.152: U9.10 19.023,19.651 19.651,20.278 26.722,20.278 27.573,21.13 27.573,28.996 R25.1@28.473,29.896
NetR37_11: R37.11
NetR37_12: R37.12
NetR37_13: R37.13 U9.20 | length 27.4
  Top Layer w0.152: v1(15.502,13.132) 15.614,13.244 U9.20 ; v1(18.002,32.232) 17.902,32.132 20.181,32.132 20.337,31.975 20.839,31.975 20.938,31.876 21.458,31.876 21.852,31.482 R37.13
  Bottom Layer w0.152: v1(15.502,13.132) 16.279,13.132 16.702,13.555 16.702,29.632 18.002,30.932 v1(18.002,32.232)
NetR37_14: R37.14 R38.10 R38.16 R39.6 U9.17 | length 35.4
  Top Layer w0.152: R38.16 11.052,32.382 11.802,33.132 13.502,33.132 14.052,32.582 ; R39.6 14.052,15.382 14.69,14.744 U9.17 ; R38.10 v1(14.052,31.832) 14.052,32.582 ; R37.14 21.352,31.182 20.962,31.571 20.812,31.571 20.713,31.67 17.764,31.67 16.852,32.582 14.052,32.582
  Bottom Layer w0.152: v1(14.052,16.382) 14.081,16.41 14.081,31.803 v1(14.052,31.832)
NetR37_15: R37.15 R38.12 R39.5 U9.16 | length 30.9
  Top Layer w0.152: R38.12 v1(13.052,31.882) ; v1(13.552,15.782) R39.5 ; v1@14.89,15.244 U9.16 ; v1(16.502,31.932) 17.068,31.365 20.587,31.365 20.685,31.267 20.767,31.267 20.852,31.182 R37.15
  Bottom Layer w0.152: v1(13.052,31.882) 13.023,31.853 13.023,17.21 13.502,16.732 v1@13.502,15.832 ; v1@13.181,32.01 13.497,32.327 16.107,32.327 v1(16.502,31.932) ; v1(13.552,15.782) 14.002,15.332 v1(14.802,15.332)
NetR37_16: R37.16 R38.11 R38.15 R39.7 U9.15 | length 34.4
  Top Layer w0.152: R38.15 11.552,32.377 12.002,32.827 13.007,32.827 13.552,32.282 R38.11 ; R39.7 14.552,16.482 v1(14.852,16.182) 15.302,15.732 U9.15@17.311,15.732 ; v1(17.152,30.882) R37.16
  Bottom Layer w0.152: v1(12.802,32.632) 16.902,32.632 17.152,32.382 v1(17.152,30.882) v1@17.123,30.91 ; v1(14.852,16.182) 15.081,16.41 15.081,30.087 15.904,30.91 v1@17.123,30.91 ; v1@17.102,30.932 v1@17.123,30.91
NetR38_9: R38.9 U9.19 | length 20.4
  Top Layer w0.152: R38.9 14.552,31.282 14.702,31.432 15.202,31.432 16.102,30.532 v1(16.102,30.432) v1@16.002,30.432 ; v1(16.202,13.732) U9.19@17.311,13.732
  Bottom Layer w0.152: v1(16.102,30.432) 16.303,30.231 16.303,13.833 v1(16.202,13.732)
NetR38_13: R38.13
NetR38_14: R38.14 U9.18 | length 24.1
  Top Layer w0.152: R38.14 v1(12.052,31.982) ; v1@12.114,14.244 U9.18
  Bottom Layer w0.152: v1(12.052,14.182) 12.023,14.21 12.023,15.969 12.061,16.007 12.061,16.403 12.023,16.441 12.023,31.953 v1(12.052,31.982)
NetR39_1: R39.1 U9.13 | length 9
  Top Layer w0.152: v1(10.833,17.082) R39.1 ; v1(15.824,17.805) 16.886,16.744 U9.13
  Signal Layer 1 w0.152: v1(10.833,17.082) 10.833,17.94 11.385,18.491 15.138,18.491 v1(15.824,17.805)
NetR39_2: R39.2 U9.12 | length 8
  Top Layer w0.152: v1(11.582,16.205) 12.052,16.675 R39.2 ; v1@17.354,17.444 U9.12
  Signal Layer 1 w0.152: v1(11.582,16.205) 12.548,17.17 17.018,17.17 v1(17.323,17.475)
NetR39_3: R39.3 U9.14 | length 5.9
  Top Layer w0.152: v1(12.552,16.379) R39.3 ; v1(15.621,16.459) 15.836,16.244 U9.14
  Signal Layer 1 w0.152: v1(12.552,16.379) 13.034,16.86 15.22,16.86 v1(15.621,16.459)
NetR39_4: R39.4 U9.43 | length 16.1
  Top Layer w0.152: R39.4 13.052,15.498 v1(13.767,14.783) ; U9.43 v1@25.648,14.244
  Signal Layer 1 w0.152: v1(13.767,14.783) 14.046,14.503 25.4,14.503 v1(25.654,14.249)
NetR39_8: R39.8
NetU8_9: U8.9
NetU8_10: U8.10
NetU8_11: U8.11
NetU8_12: U8.12
NetU9_11: U9.11
NetU9_26: U9.26
NetU9_29: U9.29
NetU9_30: U9.30
NetU9_31: U9.31
PA11: U9.32 USB1.2 | length 14.4
  Top Layer w0.254: USB1.2@11.652,5.681 11.652,9.282 12.202,9.832 17.838,9.832 17.855,9.814 21.385,9.814 21.523,9.953 U9.32
PA12: U9.33 USB1.3 | length 14.3
  Top Layer w0.254: USB1.3@12.302,5.681 12.302,9.232 12.496,9.425 17.67,9.425 17.687,9.408 21.678,9.408 22.023,9.753 U9.33
PA13: P3.3 U9.34 | length 11.9
  Top Layer w0.254: U9.34 22.523,7.424 25.883,4.064 28.143,4.064 28.55,4.47 P3.3
PA14: P3.2 U9.37 | length 8
  Top Layer w0.254: U9.37 25.799,11.244 27.902,9.141 P3.2@27.902,5.675
PA15: R16.8 U9.38 | length 2.9
  Top Layer w0.254: U9.38 R16.8@27.132,11.744
REF1_N: C28.2 P2.16 | length 27.7
  Top Layer w0.152: P2.16 21.602,39.958 21.438,40.122 21.438,40.996 22.098,41.656 30.243,41.656 35.554,36.346 35.554,31.733 38.229,29.058 38.229,28.657 C28.2
REF1_P: C27.2 P2.15 | length 29.1
  Top Layer w0.152: P2.15 20.602,39.958 21.031,40.387 21.031,41.164 21.853,41.986 30.344,41.986 35.941,36.389 35.941,31.92 38.635,29.226 38.635,28.657 C27.2
REFLECT1_N: C31.1 P2.19 | length 21.6
  Top Layer w0.152: P2.19 24.602,39.958 24.462,40.098 24.462,40.207 24.844,40.589 30.023,40.589 34.342,36.27 34.342,30.351 36.019,28.674 C31.1
REFLECT1_P: C30.1 P2.18 | length 23.2
  Top Layer w0.152: P2.18 23.678,39.208 23.678,40.001 24.673,40.996 30.047,40.996 34.646,36.396 34.646,30.621 36.425,28.842 36.425,28.826 C30.1
SW1: L3.1 U10.11 | length 2
  Top Layer w0.254: L3.1@4.137,38.815 5.123,37.829 U10.11
SW2: L3.2 U10.9 | length 2.1
  Top Layer w0.254: U10.9 6.123,37.847 L3.2@7.137,38.861
VSYS: C8.1 C9.1 C42.2 C43.2 C44.2 D1.2 D2.2 R21.2 T11.1 U2.10 U2.11 U2.12 U2.13 U10.12 U10.13 | length 59
  Top Layer w0.203: v1(1.016,33.452) R21.2
  Top Layer w0.254: 6.302,10.742 U2.13
  Top Layer w0.508: C8.1 D2.2@11.002,11.935 ; v1(18.902,5.232) D1.2
  Top Layer w0.762: C43.2@1.597,36.975 3.868,36.975 4.039,36.805 ; T11.1@3.429,7.798 6.071,7.798 7.821,9.548 C9.1
  Bottom Layer w0.762: v1(2.032,37.592) v1(1.27,37.592) 0.762,37.084 0.762,10.338 T11.1 ; v1(9.102,10.132) 15.602,10.132 18.802,6.932 18.802,5.332 v1(18.902,5.232)
  other v2: 19.402,4.932 9.802,10.132
pads on no net: P1.24 P1.25 P1.26 P1.27 P1.28 P1.29 P3.4 R19.5 R19.6 R19.7 R19.8 R37.7 R37.8 R37.9 R37.10 SW1.3 SW1.4 U2.4 U3.4 U4.4 U5.4 U6.4 U6.6 U6.14 U6.15 U6.16 U6.17 U6.18 U6.19 U6.20 U6.21 U7.3 U8.7 U9.4 U9.6 U9.7 U9.21 U9.25 U9.27 U9.28 U9.42 U10.6 U10.15 USB1.4

## Polygon pours and split planes (outlines as drawn)
GND on Bottom Layer "GND_L04_P002" (solid, remove dead copper, pour order 2): -3.698,0 49.784,0 49.784,42.682 -3.698,42.682
GND on Top Layer "GND_L01_P000" (solid, remove dead copper, pour order 0): 0,42.682 49.784,42.682 49.784,0 0,0
GND on Internal Plane 1 (split plane): 49.274,0.51 0.51,0.51 0.51,42.171 49.274,42.171

## Keep-outs
Keep-Out Layer:
  the board outline again, w0.33

## Other copper
Top Layer:
  rectangle net GND: 2.362,11.024 3.099,12.497
  rectangle net VSYS: 4.402,9.832 9.302,10.932
  rectangle net NetL2_1: 4.502,14.115 5.602,15.232
  rectangle net 3.6V: 6.6,18.032 8.302,26.432

## Text inside footprints (layer, text, board x,y; h text height)
R16: Mechanical 1 "R1" at 27.455,12.696 h0.3 r270
R19: Mechanical 1 "R1" at 44.701,20.912 h0.3 r180
U6: Top Overlay "*" at 40.035,21.276 h1 r180